# EAGLE board T01_Synth_Glove_Prototype_Board_Amplifier (EAGLE 7.1.0)
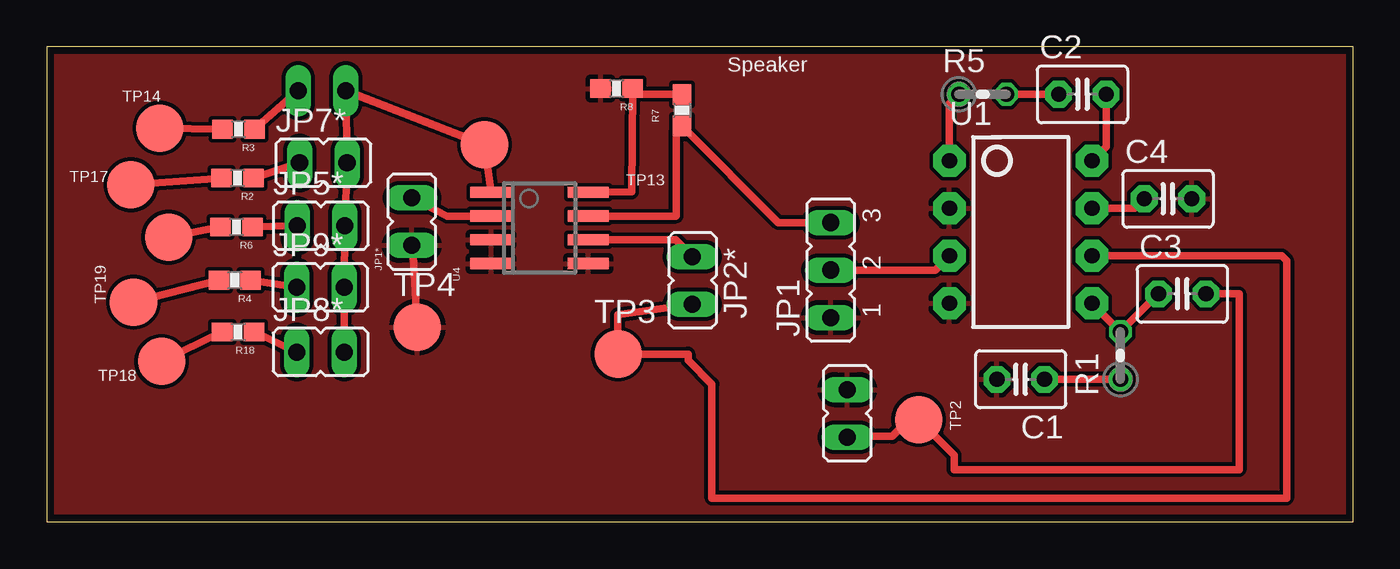
[diagram p0: board, top side]
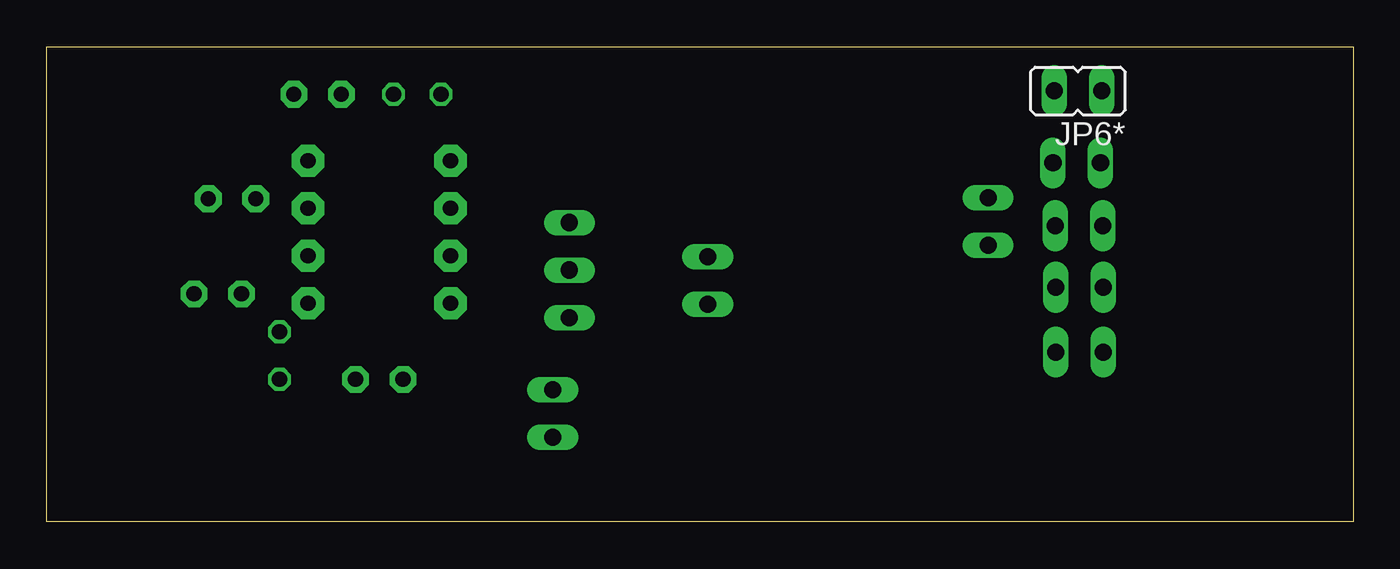
[diagram p1: board, bottom side, seen from below]

Size 69.85 x 25.4 mm. Coordinates in mm from the lower left corner, seen from the top.
Outline: 0,0 69.85,0 69.85,25.4 0,25.4 0,0
Copper layers (1*16): Top 0.0178mm / dielectric 59mil / Bottom 0.0178mm
Design rules "epl-lpkf *": minimum track width 8mil, minimum drill 0.35mm, track to track 8mil, track to pad 8mil, pad to pad 8mil, via to via 8mil, smd to smd 8mil, copper to edge 15mil, drill to drill 15mil, minimum pad ring 8mil, minimum via ring 8mil, stop-mask expansion 3mil, vias tented up to drill 0mil, thermal gap 10mil

## Footprints (pad centres in the part's own frame; a part is rotated, then mirrored left to right if it is on the bottom)
C025-030X050 = drill 0.813 pad 1.422 octagon: 1 -1.27,0; 2 1.27,0
JP2 = drill 0.914 long: 1 -2.54,0; 2 0,0; 3 2.54,0
JP1 = drill 0.914 long: 1 0,-1.27; 2 0,1.27
0204V = drill 0.813 octagon: 1 -1.27,0; 2 1.27,0
0603-RES = smd 1.1 x 1: 1 -0.85,0; 2 0.85,0
B2,54 = smd 2.54 x 2.54: TP 0,0
DIP08 = drill 0.813 pad 1.727 octagon: 1 -3.81,-3.81; 2 -1.27,-3.81; 3 1.27,-3.81; 4 3.81,-3.81; 5 3.81,3.81; 6 1.27,3.81; 7 -1.27,3.81; 8 -3.81,3.81
SO08 = smd 0.6 x 2.2: 1 -1.905,-2.6; 2 -0.635,-2.6; 3 0.635,-2.6; 4 1.905,-2.6; 5 1.905,2.6; 6 0.635,2.6; 7 -0.635,2.6; 8 -1.905,2.6

## Placement (x,y rotation side)
C1  50n  [C025-030X050]  52.07,7.62 180 top
C2  10u  [C025-030X050]  55.37,22.86 0 top
C3  250u  [C025-030X050]  60.71,12.19 0 top
C4  100n  [C025-030X050]  59.94,17.27 0 top
JP1  10k  [JP2]  41.91,13.46 90 top
JP1*  0  [JP1]  19.52,16.05 180 top
JP2*  0  [JP1]  34.51,12.91 0 top
JP5*  0  [JP1]  14.65,15.83 270 top
JP6*  0  [JP1]  14.72,23.04 90 bottom
JP7*  0  [JP1]  14.78,19.19 270 top
JP8*  0  [JP1]  14.64,9.08 270 top
JP9*  0  [JP1]  14.63,12.54 270 top
R1  10  [0204V]  57.4,8.89 90 top
R2  100k  [0603-RES]  10.2,18.38 180 top
R3  100k  [0603-RES]  10.25,20.98 180 top
R4  NP  [0603-RES]  10.05,12.91 180 top
R5  1.2k  [0204V]  50.04,22.86 0 top
R6  100k  [0603-RES]  10.14,15.76 180 top
R7  1k  [0603-RES]  33.97,22 270 top
R8  100k  [0603-RES]  30.47,23.16 180 top
R18  100k  [0603-RES]  10.23,10.15 180 top
TP1  PTR1B2,54  [B2,54]  23.4,20.17 0 top
TP2  PTR1B2,54  [B2,54]  46.61,5.47 0 top
TP3  PTR1B2,54  [B2,54]  30.55,8.97 0 top
TP4  PTR1B2,54  [B2,54]  19.81,10.41 0 top
TP13  PTR1B2,54  [B2,54]  6.52,15.22 0 top
TP14  PTR1B2,54  [B2,54]  6.05,21.05 0 top
TP17  PTR1B2,54  [B2,54]  4.49,18.02 0 top
TP18  PTR1B2,54  [B2,54]  6.15,8.58 0 top
TP19  PTR1B2,54  [B2,54]  4.64,11.75 0 top
U1  LM386  [DIP08]  52.07,15.49 270 top
U4  LT1013  [SO08]  26.35,15.71 270 top
U$1  SPEAKER  [JP1]  42.8,5.79 0 top

## Library data of the parts
C1-C4 R1 R5 = adafruit
JP1 JP1* JP2* JP5* JP6* JP7* JP8* JP9* = jumper
R2-R4 R6-R8 R18 = SparkFun-Resistors
TP1-TP4 TP13 TP14 TP17-TP19 = testpad
U1 = SparkFun-AnalogIC
U4 U$1 = Synth_Glove

## Nets
+9V: JP2*.1 TP3.TP U1.6
GND: C1.2 C4.2 JP1*.2 JP1.1 R8.2 TP4.TP U1.2 U1.4 U4.3 U4.4 U4.5 U$1.2
N$1: C3.1 R1.2 U1.5
N$2: JP5*.2 JP6*.2 JP7*.2 JP8*.2 JP9*.2 TP1.TP U4.1
N$3: JP1.3 R7.2 U4.7
N$4: C1.1 R1.1
N$5: C3.2 TP2.TP U$1.1
N$6: C2.2 U1.8
N$7: C2.1 R5.2
N$8: R5.1 U1.1
N$9: C4.1 U1.7
N$10: JP1.2 U1.3
N$16: R7.1 R8.1 U4.8
N$18: JP5*.1 R6.1
N$21: JP6*.1 R3.1
N$25: JP7*.1 R2.1
N$26: JP2*.2 U4.6
N$27: JP8*.1 R18.1
N$32: JP9*.1 R4.1
PB1: R6.2 TP13.TP
PB2: R3.2 TP14.TP
PB3: R2.2 TP17.TP
PD5: R18.2 TP18.TP
PD6: R4.2 TP19.TP
V-: JP1*.1 U4.2

## Tracks (layer width: path | path; a pad name or v marks a point on that pad's centre or on a via)
+9V
  Top 0.406: JP2*.1 30.52,11.07 TP3.TP 34.29,8.97 34.29,8.64 35.56,7.37 35.56,1.27 66.29,1.27 66.29,13.97 66.04,14.22 U1.6
GND
  Top 0.406: 19.56,14.73 TP4.TP
  pour Top: 0,25.4 69.85,25.4 69.85,0 0,0
N$1
  Top 0.406: U1.5 R1.2 C3.1
N$2
  Top 0.406: U4.1 TP1.TP JP6*.2 JP7*.2 JP5*.2 JP9*.2 JP8*.2
N$3
  Top 0.406: JP1.3 39.12,16 R7.2 33.65,20.84 33.65,16.36 33.64,16.35 U4.7
N$4
  Top 0.406: R1.1 C1.1
N$5
  Top 0.406: C3.2 63.75,12.19 63.75,2.79 48.51,2.79 48.51,3.56 TP2.TP 46.11,5.47 45.21,4.57 42.84,4.57 U$1.1
N$6
  Top 0.406: C2.2 56.64,20.07 U1.8
N$7
  Top 0.406: R5.2 C2.1
N$8
  Top 0.406: U1.1 48.26,22.35 R5.1
N$9
  Top 0.406: U1.7 58.17,16.76 C4.1
N$10
  Top 0.406: JP1.2 47.5,13.46 U1.3
N$16
  Top 0.406: U4.8 31.27,17.64 R8.1 31.63,22.86 R7.1
N$18
  Top 0.406: R6.1 JP5*.1
N$21
  Top 0.406: R3.1 JP6*.1
N$25
  Top 0.406: R2.1 JP7*.1
N$26
  Top 0.406: U4.6 33.62,15.08 JP2*.2
N$27
  Top 0.406: R18.1 JP8*.1
N$32
  Top 0.406: R4.1 JP9*.1
PB1
  Top 0.406: TP13.TP R6.2
PB2
  Top 0.406: TP14.TP R3.2
PB3
  Top 0.406: TP17.TP R2.2
PD5
  Top 0.406: TP18.TP R18.2
PD6
  Top 0.406: TP19.TP R4.2
V-
  Top 0.406: U4.2 21.4,16.34 JP1*.1

## Text on the board
tPlace: Speaker